# Altium PCB Super_Hornet.PcbDoc (part 4 of 4)
Units mil, origin at the board's own origin, x right, y up, seen from the top; angles counter-clockwise.
Board outline 6000 x 4000 mil, 2 copper layers (Top Layer, Bottom Layer); 166 components, 85 nets, 398 pads, 0 vias.
Unrouted connection lines stored in the file: 74.
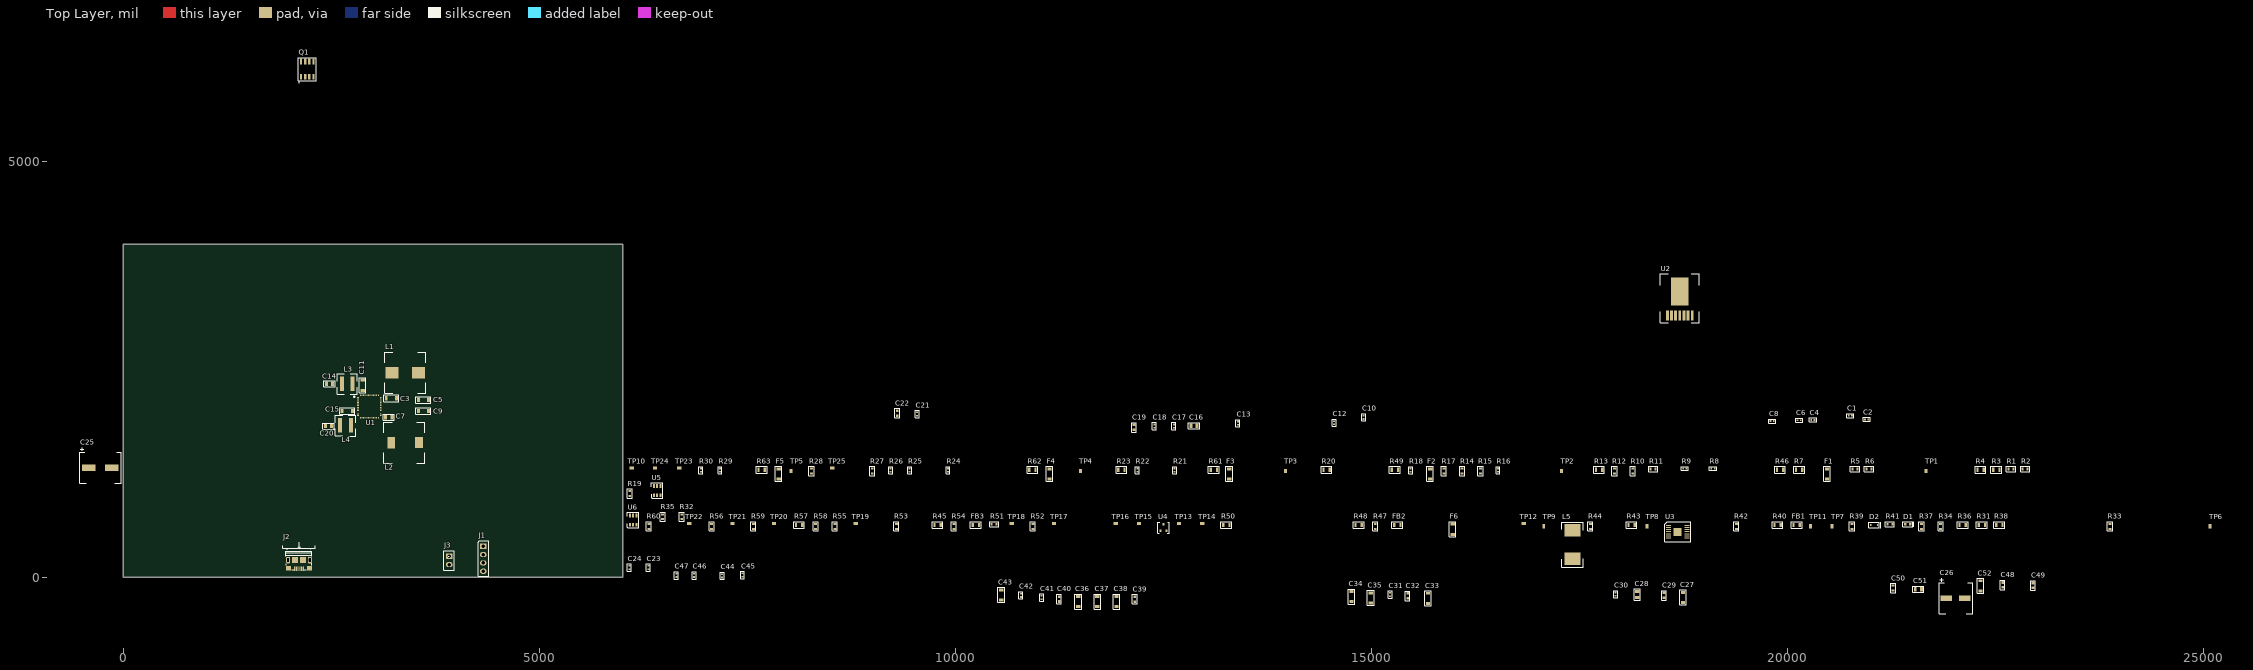
[diagram p0: Top Layer view]

## Part data (continued)
R42 R51: "RES SMD 49.9K OHM 1% 1/10W 0603", Manufacturer=Panasonic, Rated Power="0.1 W", Resistance=49.9K, Supplier Part Number 1=P49.9KHCT-ND, Temp Coefficient="±100 ppm/°C", Tolerance (%)="±1 %", ComponentLink1Description=http://industrial.panasonic.com/cdbs/www-data/pdf/RDA0000/AOA0000C304.pdf?src-supplier=Farnell, ComponentLink1URL=http://industrial.panasonic.com/cdbs/www-data/pdf/RDA0000/AOA0000C304.pdf?src-supplier=Farnell, ComponentLink2Description=http://www.farnell.com/datasheets/1911175.pdf?src-supplier=Element14, ComponentLink2URL=http://www.farnell.com/datasheets/1911175.pdf?src-supplier=Element14, ComponentLink3Description=http://industrial.panasonic.com/www-data/pdf/AOA0000/AOA0000CE2.pdf?src-supplier=Future+Electronics, ComponentLink3URL=http://industrial.panasonic.com/www-data/pdf/AOA0000/AOA0000CE2.pdf?src-supplier=Future+Electronics, ComponentLink4Description=http://industrial.panasonic.com/www-data/pdf/AOA0000/AOA0000CE2.pdf?src-supplier=Avnet+Europe, ComponentLink4URL=http://industrial.panasonic.com/www-data/pdf/AOA0000/AOA0000CE2.pdf?src-supplier=Avnet+Europe, ComponentLink5Description=http://www.farnell.com/datasheets/1911175.pdf?src-supplier=Farnell, ComponentLink5URL=http://www.farnell.com/datasheets/1911175.pdf?src-supplier=Farnell, ComponentLink6Description=http://industrial.panasonic.com/www-data/pdf/AOA0000/AOA0000CE2.pdf?src-supplier=Avnet, ComponentLink6URL=http://industrial.panasonic.com/www-data/pdf/AOA0000/AOA0000CE2.pdf?src-supplier=Avnet, ComponentLink7Description=http://www.farnell.com/datasheets/1678782.pdf?src-supplier=Element14, ComponentLink7URL=http://www.farnell.com/datasheets/1678782.pdf?src-supplier=Element14, ComponentLink8Description=https://www.verical.com/server-webapp/html/getDatasheet?partID=52039&src-supplier=Verical, ComponentLink8URL=https://www.verical.com/server-webapp/html/getDatasheet?partID=52039&src-supplier=Verical, ComponentLink9Description=http://www.jameco.com/Jameco/Products/ProdDS/1988209.pdf?src-supplier=Jameco, ComponentLink9URL=http://www.jameco.com/Jameco/Products/ProdDS/1988209.pdf?src-supplier=Jameco, Manufacturer Part Number=ERJ-3EKF4992V, Pricing 1="1=0.1, 10=0.035, 100=0.0143, 1000=0.0064, 2500=0.0056 (USD)", Size Code=0603, Stock 1=110527, Supplier 1=Digi-Key
R47: "RES SMD 100K OHM 1% 1/10W 0603", Manufacturer=Panasonic, Rated Power="0.1 W", Resistance=100K, Supplier Part Number 1=P100KHCT-ND, Temp Coefficient="±100 ppm/°C", Tolerance (%)="±1 %", ComponentLink1Description=http://industrial.panasonic.com/www-data/pdf/AOA0000/AOA0000CE2.pdf?src-supplier=Future+Electronics, ComponentLink1URL=http://industrial.panasonic.com/www-data/pdf/AOA0000/AOA0000CE2.pdf?src-supplier=Future+Electronics, ComponentLink2Description=https://www.verical.com/server-webapp/html/getDatasheet?partID=247527&src-supplier=Verical, ComponentLink2URL=https://www.verical.com/server-webapp/html/getDatasheet?partID=247527&src-supplier=Verical, ComponentLink3Description=http://www.alliedelec.com/m/d/623f45ff1957d936ff56d46fd1c28cac.pdf?src-supplier=Allied+Electronics, ComponentLink3URL=http://www.alliedelec.com/m/d/623f45ff1957d936ff56d46fd1c28cac.pdf?src-supplier=Allied+Electronics, ComponentLink4Description=http://www.jameco.com/Jameco/Products/ProdDS/1987476.pdf?src-supplier=Jameco, ComponentLink4URL=http://www.jameco.com/Jameco/Products/ProdDS/1987476.pdf?src-supplier=Jameco, Manufacturer Part Number=ERJ3EKF1003V, Pricing 1="1=0.1, 10=0.062, 100=0.0252, 1000=0.0113, 2500=0.0098 (USD)", Size Code=0603, Stock 1=221575, Supplier 1=Digi-Key
R52: "RES SMD 150K OHM 1% 1/10W 0603", Case Size=0603, Case Style=Molded, Manufacturer=Panasonic, Operating Temperature="-55 to 155 °C", Power Rating="1/10 W", Resistance Value=150K, Supplier Part Number 1=P150KHCT-ND, Temperature Coefficient="±100 ppm/°C", Tolerance="1 %", Category="Resistor Fixed Single-Surface Mount", ComponentLink1Description=http://industrial.panasonic.com/www-data/pdf/AOA0000/AOA0000CE2.pdf?src-supplier=Avnet+Europe, ComponentLink1URL=http://industrial.panasonic.com/www-data/pdf/AOA0000/AOA0000CE2.pdf?src-supplier=Avnet+Europe, ComponentLink2Description=http://industrial.panasonic.com/www-data/pdf/AOA0000/AOA0000CE2.pdf?src-supplier=Avnet, ComponentLink2URL=http://industrial.panasonic.com/www-data/pdf/AOA0000/AOA0000CE2.pdf?src-supplier=Avnet, ComponentLink3Description=http://www.alliedelec.com/m/d/623f45ff1957d936ff56d46fd1c28cac.pdf?src-supplier=Allied+Electronics, ComponentLink3URL=http://www.alliedelec.com/m/d/623f45ff1957d936ff56d46fd1c28cac.pdf?src-supplier=Allied+Electronics, ComponentLink4Description=http://industrial.panasonic.com/www-data/pdf/AOA0000/AOA0000CE2.pdf?src-supplier=Element14, ComponentLink4URL=http://industrial.panasonic.com/www-data/pdf/AOA0000/AOA0000CE2.pdf?src-supplier=Element14, ComponentLink5Description=http://www.farnell.com/datasheets/426256.pdf?src-supplier=Element14, ComponentLink5URL=http://www.farnell.com/datasheets/426256.pdf?src-supplier=Element14, ComponentLink6Description=http://www.farnell.com/datasheets/1678782.pdf?src-supplier=Element14, ComponentLink6URL=http://www.farnell.com/datasheets/1678782.pdf?src-supplier=Element14, ComponentLink7Description=http://www.farnell.com/datasheets/1911175.pdf?src-supplier=Farnell, ComponentLink7URL=http://www.farnell.com/datasheets/1911175.pdf?src-supplier=Farnell, Lead Finish=Tin, Manufacturer Part Number=ERJ-3EKF1503V, Pricing 1="1=0.1, 10=0.058, 100=0.0234, 1000=0.0105, 2500=0.0091 (USD)", Stock 1=81478, Supplier 1=Digi-Key, Type="Thick Film"
R55 R56: "RES SMD 6.34K OHM 1% 1/10W 0603", Manufacturer=Panasonic, Power Rating=100mW, Resistance=6.34K, Resistance Tolerance="± 1%", Resistor Case Style="0603 [1608 Metric]", Resistor Element Material="Thick Film", Resistor Mounting=SMD, Supplier Part Number 1=P6.34KHCT-ND, Temperature Coefficient="± 100ppm/°C", Voltage Rating=75V, ComponentLink1Description=http://www.farnell.com/datasheets/426256.pdf?src-supplier=Element14, ComponentLink1URL=http://www.farnell.com/datasheets/426256.pdf?src-supplier=Element14, ComponentLink2Description=http://www.mouser.com/ds/2/315/AOA0000C283-1093288.pdf?src-supplier=Mouser, ComponentLink2URL=http://www.mouser.com/ds/2/315/AOA0000C283-1093288.pdf?src-supplier=Mouser, ComponentLink3Description=https://www.alliedelec.com/m/d/623f45ff1957d936ff56d46fd1c28cac.pdf?src-supplier=Allied+Electronics, ComponentLink3URL=https://www.alliedelec.com/m/d/623f45ff1957d936ff56d46fd1c28cac.pdf?src-supplier=Allied+Electronics, ComponentLink4Description=http://www.farnell.com/datasheets/1911175.pdf?src-supplier=Farnell, ComponentLink4URL=http://www.farnell.com/datasheets/1911175.pdf?src-supplier=Farnell, ComponentLink5Description=http://www.farnell.com/datasheets/1678782.pdf?src-supplier=Element14, ComponentLink5URL=http://www.farnell.com/datasheets/1678782.pdf?src-supplier=Element14, ComponentLink6Description=http://industrial.panasonic.com/www-data/pdf/AOA0000/AOA0000CE2.pdf?src-supplier=Avnet, ComponentLink6URL=http://industrial.panasonic.com/www-data/pdf/AOA0000/AOA0000CE2.pdf?src-supplier=Avnet, Manufacturer Part Number=ERJ-3EKF6341V, MSL="(Not Applicable)", Packaging="Cut Tape", Pricing 1="1=0.1, 10=0.05, 100=0.0203, 1000=0.0091, 2500=0.0079 (USD)", Product Range="PANASONIC - ERJ Series", Resistor Element Type="Thick Film", Stock 1=215692, Supplier 1=Digi-Key, SVHC="Diboron trioxide (19-Dec-2012)", SVHC (Secondary)="Lead monoxide (lead oxide) (19-Dec-2012)"
R58: "RES SMD 9.31K OHM 1% 1/10W 0603", Manufacturer=Panasonic, Rated Power="0.1 W", Resistance=9.31K, Supplier Part Number 1=P9.31KHCT-ND, Temp Coefficient="±100 ppm/°C", Tolerance (%)="±1 %", ComponentLink1Description=http://industrial.panasonic.com/www-data/pdf/AOA0000/AOA0000CE2.pdf?src-supplier=Avnet, ComponentLink1URL=http://industrial.panasonic.com/www-data/pdf/AOA0000/AOA0000CE2.pdf?src-supplier=Avnet, ComponentLink2Description=http://www.farnell.com/datasheets/1678782.pdf?src-supplier=Element14, ComponentLink2URL=http://www.farnell.com/datasheets/1678782.pdf?src-supplier=Element14, ComponentLink3Description=http://industrial.panasonic.com/www-data/pdf/AOA0000/AOA0000CE2.pdf?src-supplier=Future+Electronics, ComponentLink3URL=http://industrial.panasonic.com/www-data/pdf/AOA0000/AOA0000CE2.pdf?src-supplier=Future+Electronics, ComponentLink4Description=http://industrial.panasonic.com/www-data/pdf/AOA0000/AOA0000CE2.pdf?src-supplier=Avnet+Asia, ComponentLink4URL=http://industrial.panasonic.com/www-data/pdf/AOA0000/AOA0000CE2.pdf?src-supplier=Avnet+Asia, ComponentLink5Description=http://www.farnell.com/datasheets/1911175.pdf?src-supplier=Farnell, ComponentLink5URL=http://www.farnell.com/datasheets/1911175.pdf?src-supplier=Farnell, ComponentLink6Description=https://www.alliedelec.com/m/d/623f45ff1957d936ff56d46fd1c28cac.pdf?src-supplier=Allied+Electronics, ComponentLink6URL=https://www.alliedelec.com/m/d/623f45ff1957d936ff56d46fd1c28cac.pdf?src-supplier=Allied+Electronics, ComponentLink7Description=http://industrial.panasonic.com/www-data/pdf/AOA0000/AOA0000CE2.pdf?src-supplier=Avnet+Europe, ComponentLink7URL=http://industrial.panasonic.com/www-data/pdf/AOA0000/AOA0000CE2.pdf?src-supplier=Avnet+Europe, ComponentLink8Description=http://www.mouser.com/ds/2/315/AOA0000CE2-37512.pdf?src-supplier=Mouser, ComponentLink8URL=http://www.mouser.com/ds/2/315/AOA0000CE2-37512.pdf?src-supplier=Mouser, ComponentLink9Description=http://www.farnell.com/datasheets/1911175.pdf?src-supplier=Element14, ComponentLink9URL=http://www.farnell.com/datasheets/1911175.pdf?src-supplier=Element14, Manufacturer Part Number=ERJ-3EKF9311V, Pricing 1="1=0.1, 10=0.062, 100=0.0253, 1000=0.0113, 2500=0.0098 (USD)", Size Code=0603, Stock 1=98740, Supplier 1=Digi-Key
TP1 TP2 TP3 TP4 TP5 TP6 TP7 TP8 TP9 TP10 TP11 TP12 TP13 TP14 TP15 TP16 TP17 TP18 TP19 TP20 TP21 TP22 TP23 TP24 TP25: "PCB MINI TEST POINT", Manufacturer="Keystone Electronics", Standard Package=5,000, Supplier Part Number 1=36-5017TR-NDL, Category="Test and Measurement", ComponentLink1Description=http://www.keyelco.com/product-pdf.cfm?p=1355&src-supplier=Digi-Key, ComponentLink1URL=http://www.keyelco.com/product-pdf.cfm?p=1355&src-supplier=Digi-Key, Dynamic Catalog="Surface Mount Test Points", Family="Test Points", Featured Product="5019 Miniature Surface Mount Test Point", Manufacturer Part Number=5017, Material="Phosphor Bronze", Minimum Quantity="PC Test Point, Miniature", Mounting Type="Surface Mount", Online Catalog="Surface Mount Test Points", Other Names="5017-ND / 5017KTR / Q5021014", Packaging="Tape & Reel (TR)", Pricing 1="5000=0.0924 (USD)", Quantity Available="Tape & Reel (TR)Alternate Packaging", RoHS Information="RoHS Compliance Statement", Stock 1=285000, Supplier 1=Digi-Key, Terminal="0.010\" (0.25mm) Phosphor Bronze, Silver Plated", Type="PC Test Point, Miniature"
U1: library part ADP5052ACPZ-R7, "PMIC 4BUCK_1LDO", Frequency - Switching=740kHz, Manufacturer="Analog Devices", Operating Temperature="-40°C ~ 125°C", Package / Case="48-WFQFN Exposed Pad, CSP", Power Rating=100mW, Resistance=3.65kohm, Resistance Tolerance="± 1%", Resistor Case Style="0402 [1005 Metric]", Resistor Element Material="Thick Film", Resistor Mounting=SMD, Resistor Terminals=Wraparound, Standard Package=1, Supplier Device Package="48-LFCSP-WQ (7x7)", Supplier Part Number 1=ADP5052ACPZ-R7CT-ND, Temperature Coefficient="± 100ppm/°C", Voltage - Supply="4.5 V ~ 15 V", Voltage/Current - Output 1="0.85 V ~ 1.6 V, PROG", Voltage/Current - Output 2="3.3 V ~ 5 V, PROG", Voltage/Current - Output 3="1.2 V ~ 1.8 V, 1.2A", Voltage Rating=50V, Category="Integrated Circuits (ICs)", ComponentLink1Description=http://www.mouser.com/ds/2/609/ADP5052-878958.pdf?src-supplier=Mouser, ComponentLink1URL=http://www.mouser.com/ds/2/609/ADP5052-878958.pdf?src-supplier=Mouser, ComponentLink2Description=http://uk.rs-online.com/webdocs/1492/0900766b81492551.pdf?src-supplier=RSComponents, ComponentLink2URL=http://uk.rs-online.com/webdocs/1492/0900766b81492551.pdf?src-supplier=RSComponents, ComponentLink3Description=http://www.analog.com/media/en/technical-documentation/data-sheets/ADP5052.PDF?src-supplier=Digi-Key, ComponentLink3URL=http://www.analog.com/media/en/technical-documentation/data-sheets/ADP5052.PDF?src-supplier=Digi-Key, ComponentLink4Description=http://www.analog.com/static/imported-files/data_sheets/ADP5052.PDF?src-supplier=Avnet, ComponentLink4URL=http://www.analog.com/static/imported-files/data_sheets/ADP5052.PDF?src-supplier=Avnet, ComponentLink5Description=https://www.analog.com/media/en/technical-documentation/data-sheets/ADP5052.PDF?src-supplier=Digi-Key, ComponentLink5URL=https://www.analog.com/media/en/technical-documentation/data-sheets/ADP5052.PDF?src-supplier=Digi-Key, ComponentLink6Description=http://www.produktinfo.conrad.com/datenblaetter/1200000-1299999/001251707-da-01-en-IC_REG_5OUT_ADP5052ACPZ_R7_LFCSP_48_ADI.pdf?src-supplier=Conrad, ComponentLink6URL=http://www.produktinfo.conrad.com/datenblaetter/1200000-1299999/001251707-da-01-en-IC_REG_5OUT_ADP5052ACPZ_R7_LFCSP_48_ADI.pdf?src-supplier=Conrad, ComponentLink7Description=http://industrial.panasonic.com/www-data/pdf/AOA0000/AOA0000CE2.pdf?src-supplier=Avnet, ComponentLink7URL=http://industrial.panasonic.com/www-data/pdf/AOA0000/AOA0000CE2.pdf?src-supplier=Avnet, ComponentLink8Description=http://www.mouser.com/ds/2/315/AOA0000C283-1093288.pdf?src-supplier=Mouser, ComponentLink8URL=http://www.mouser.com/ds/2/315/AOA0000C283-1093288.pdf?src-supplier=Mouser, ComponentLink9Description=http://www.farnell.com/datasheets/1694929.pdf?src-supplier=Element14, ComponentLink9URL=http://www.farnell.com/datasheets/1694929.pdf?src-supplier=Element14, ComponentLink10Description=https://www.alliedelec.com/m/d/623f45ff1957d936ff56d46fd1c28cac.pdf?src-supplier=Allied+Electronics, ComponentLink10URL=https://www.alliedelec.com/m/d/623f45ff1957d936ff56d46fd1c28cac.pdf?src-supplier=Allied+Electronics, ComponentLink11Description=http://www.farnell.com/datasheets/1678782.pdf?src-supplier=Element14, ComponentLink11URL=http://www.farnell.com/datasheets/1678782.pdf?src-supplier=Element14, Dynamic Catalog="Linear + Switching", Family="PMIC - Voltage Regulators - Linear + Switching", Featured Product="2nd Quarter Select Products", For Use With="ADP5052-EVALZ-ND / - EVAL BOARD BUCK REG/LDO ADP5052", Function="Any Function", Manufacturer Part Number=ADP5052ACPZ-R7, Minimum Quantity="Step-Down (Buck) Synchronous (5), Linear (LDO) (1)", Mounting Type="Surface Mount", MSL="(Not Applicable)", Number of Outputs=5, Online Catalog="Linear + Switching", Other Names=ADP5052ACPZ-R7CT, Package/Case="48-WFQFN Exposed Pad, CSP", Packaging="Cut Tape (CT)", PCN Assembly/Origin="Assembly and Test Transfer LFCSP Devices 22/Oct/2013 /  / Assembly/Test Site Revision D 06/Aug/2014", PCN Design/Specification="ADP5050/ADP5052 Die Revision 06/Jan/2014", Pricing 1="1=8.54, 10=7.719, 25=7.3596, 100=6.103, 250=5.5645 (USD)", Pricing 2="1=0.1, 10=0.041, 100=0.0166, 1000=0.0075, 2500=0.0065, 5000=0.0054 (USD)", Product Range="PANASONIC - ERJ Series", Quantity Available="Cut Tape (CT)Alternate Packaging", Resistor Element Type="Thick Film", Stock 1=0, Stock 2=78045, Supplier 1=Digi-Key, Supplier 2=Digi-Key, Supplier Part Number 2=P3.65KLCT-ND, SVHC="Diboron trioxide (19-Dec-2012)", SVHC (Secondary)="Lead monoxide (lead oxide) (19-Dec-2012)", Topology="Step-Down (Buck) Synchronous (4), Linear (LDO) (1)", w/LED Driver=No, w/Sequencer=No, w/Supervisor=No
U2: "DC DC CONVERTER 0.8-6V", Manufacturer="TI National Semiconductor", Operating Temperature (Max)=125C, Operating Temperature (Min)=-40C, Output Current=5A, Output Power=30W, Supplier Part Number 1=296-43603-1-ND, ComponentLink1Description=http://www.ti.com/lit/ds/symlink/lmz22005.pdf?src-supplier=Digi-Key, ComponentLink1URL=http://www.ti.com/lit/ds/symlink/lmz22005.pdf?src-supplier=Digi-Key, Manufacturer Part Number=LMZ22005TZX/NOPB, Mounting Style="Surface Mount", Number of Outputs=1, Package / Case=-40C, Packaging="Tape and Reel", Pin Count="Tape and Reel", Pricing 1="1=9.19, 5=9.124, 10=9.055, 25=8.9156, 50=8.637, 100=7.8012, 250=7.6619 (USD)", Product Depth (mm)="Surface Mount", Product Height (mm)=4.57mm, Product Length (mm)=10.16mm, Screening Level=Automotive, Stock 1=1814, Supplier 1=Digi-Key, Type="Step Down"
U3: "IC REG BUCK ADJ 3A SYNC 14HTSSOP", Current - Output=3A, Frequency - Switching=700kHz, Manufacturer="Texas Instruments", Operating Temperature="-40°C ~ 85°C", Package / Case="14-TSSOP (0.173\", 4.40mm Width) Exposed Pad", Standard Package=1, Supplier Device Package=14-HTSSOP, Supplier Part Number 1=296-24557-1-ND, Voltage - Input="2 V ~ 18 V", Voltage - Output="0.76 V ~ 5.5 V", Category="Integrated Circuits (ICs)", ComponentLink1Description=http://www.ti.com/lit/ds/symlink/tps54325.pdf?src-supplier=Digi-Key, ComponentLink1URL=http://www.ti.com/lit/ds/symlink/tps54325.pdf?src-supplier=Digi-Key, ComponentLink2Description=http://www.ti.com/lit/gpn/tps54325?src-supplier=Mouser, ComponentLink2URL=http://www.ti.com/lit/gpn/tps54325?src-supplier=Mouser, ComponentLink3Description=http://www.ti.com/general/docs/lit/getliterature.tsp?genericPartNumber=TPS54325&&fileType=pdf&src-supplier=Avnet, ComponentLink3URL=http://www.ti.com/general/docs/lit/getliterature.tsp?genericPartNumber=TPS54325&&fileType=pdf&src-supplier=Avnet, ComponentLink4Description=http://datasheet.iiic.cc/texas_instruments/TPS54325PWPR.pdf?src-supplier=IIIC, ComponentLink4URL=http://datasheet.iiic.cc/texas_instruments/TPS54325PWPR.pdf?src-supplier=IIIC, ComponentLink5Description=http://www.produktinfo.conrad.com/datenblaetter/1000000-1099999/001014848-da-01-en-IC_REG_BUCK_SY_TPS54325PWPR_TSSOP_14_TID.pdf?src-supplier=Conrad, ComponentLink5URL=http://www.produktinfo.conrad.com/datenblaetter/1000000-1099999/001014848-da-01-en-IC_REG_BUCK_SY_TPS54325PWPR_TSSOP_14_TID.pdf?src-supplier=Conrad, Dynamic Catalog="Buck (Step-Down) IC", Family="PMIC - Voltage Regulators - DC DC Switching Regulators", Featured Product="TPS54325 - 3A Step-Down SWIFT™ Converter /  / WEBENCH Design Center", Manufacturer Part Number=TPS54325PWPR, Mounting Type="Surface Mount", Number of Outputs=1, Other Names=296-24557-1, Output Type=Adjustable, Packaging="Cut Tape (CT)", Pricing 1="1=1.63, 10=1.468, 25=1.3852, 100=1.108, 250=0.9695, 500=0.9418, 1000=0.7479 (USD)", Product Training Modules="Understanding SWIFT Step Down Dc/Dc Converters", PWM Type=Hybrid, Series="SWIFT™, D-CAP2™", Stock 1=45243, Supplier 1=Digi-Key, Synchronous Rectifier=Yes, Type="Step-Down (Buck)"
U4: "IC VREF SERIES 0.2% SOT23-3", Manufacturer="Texas Instruments", Maximum Input Voltage="7 V", Maximum Output Current="25 mA", Maximum Temperature Coefficient="75 ppm/°C", Operating Temperature="-40 to 125 °C", Output Voltage="1.25 V", Package=3SOT-23, Supplier Part Number 1=296-32213-1-ND, Category="Voltage Reference", ComponentLink1Description=http://www.ti.com/lit/ds/symlink/ref3012.pdf?src-supplier=Digi-Key, ComponentLink1URL=http://www.ti.com/lit/ds/symlink/ref3012.pdf?src-supplier=Digi-Key, ComponentLink2Description=http://www.ti.com/general/docs/lit/getliterature.tsp?genericPartNumber=REF3030&&fileType=pdf&src-supplier=Avnet, ComponentLink2URL=http://www.ti.com/general/docs/lit/getliterature.tsp?genericPartNumber=REF3030&&fileType=pdf&src-supplier=Avnet, Initial Accuracy="0.2 %", Line Regulation="190 uV/V", Load Regulation="100 uV/mA", Manufacturer Part Number=REF3012AIDBZR, Mounting="Surface Mount", Packaging="Tape & Reel", Pricing 1="1=1.39, 10=1.245, 25=1.1816, 100=0.9073, 250=0.8018, 500=0.7596, 1000=0.5908 (USD)", Rad Hard=No, Reference Type=Precision, Stock 1=28859, Supplier 1=Digi-Key, Topology=Series
U5 U6: "IC OPAMP CURR SENSE 14KHZ SC70-6", Current - Input Bias=28µA, Current - Output / Channel=-, Current - Supply=65µA, Manufacturer="Texas Instruments", Operating Temperature="-40°C ~ 105°C", Package / Case="6-TSSOP, SC-88, SOT-363", Standard Package=1, Supplier Device Package=SC-70-6, Supplier Part Number 1=296-27329-1-ND, Voltage - Input Offset=5µV, Voltage - Supply, Single/Dual (±)="2.7 V ~ 26 V", -3db Bandwidth=-, Amplifier Type="Current Sense", Category="Integrated Circuits (ICs)", ComponentLink1Description=http://components.arrow.com/part/dataview/48823731S9057778N7713?src-supplier=Arrow, ComponentLink1URL=http://components.arrow.com/part/dataview/48823731S9057778N7713?src-supplier=Arrow, ComponentLink2Description=https://www.verical.com/server-webapp/html/getDatasheet?partID=518602&src-supplier=Verical, ComponentLink2URL=https://www.verical.com/server-webapp/html/getDatasheet?partID=518602&src-supplier=Verical, ComponentLink3Description=http://components.arrow.com/part/dataview/0323_01815168?src-supplier=Arrow+Europe, ComponentLink3URL=http://components.arrow.com/part/dataview/0323_01815168?src-supplier=Arrow+Europe, ComponentLink4Description=http://www.farnell.com/datasheets/2019159.pdf?src-supplier=Element14, ComponentLink4URL=http://www.farnell.com/datasheets/2019159.pdf?src-supplier=Element14, ComponentLink5Description=http://www.ti.com/general/docs/lit/getliterature.tsp?genericPartNumber=INA199&fileType=pdf&src-supplier=Farnell, ComponentLink5URL=http://www.ti.com/general/docs/lit/getliterature.tsp?genericPartNumber=INA199&fileType=pdf&src-supplier=Farnell, ComponentLink6Description=http://focus.ti.com/lit/ds/symlink/ina199a2.pdf?src-supplier=Avnet+Europe, ComponentLink6URL=http://focus.ti.com/lit/ds/symlink/ina199a2.pdf?src-supplier=Avnet+Europe, ComponentLink7Description=http://www.farnell.com/datasheets/1846955.pdf?src-supplier=Farnell, ComponentLink7URL=http://www.farnell.com/datasheets/1846955.pdf?src-supplier=Farnell, ComponentLink8Description=http://www.ti.com/lit/ds/symlink/ina199.pdf?src-supplier=Digi-Key, ComponentLink8URL=http://www.ti.com/lit/ds/symlink/ina199.pdf?src-supplier=Digi-Key, ComponentLink9Description=http://www.ti.com/lit/gpn/ina199?src-supplier=Mouser, ComponentLink9URL=http://www.ti.com/lit/gpn/ina199?src-supplier=Mouser, ComponentLink10Description=http://www.ti.com/general/docs/lit/getliterature.tsp?genericPartNumber=INA199&&fileType=pdf&src-supplier=Avnet, ComponentLink10URL=http://www.ti.com/general/docs/lit/getliterature.tsp?genericPartNumber=INA199&&fileType=pdf&src-supplier=Avnet, Dynamic Catalog="Current Sense", Family="Linear - Amplifiers - Instrumentation, OP Amps, Buffer Amps", Gain Bandwidth Product=14kHz, Manufacturer Part Number=INA199A1DCKR, Mounting Type="Surface Mount", Number of Circuits=1, Other Names=296-27329-6, Output Type=-, Packaging=Digi-Reel®, Pricing 1="1=0.83, 10=0.738, 25=0.7, 100=0.5375, 250=0.475, 500=0.45, 1000=0.35 (USD)", Series=-, Slew Rate="0.4 V/µs", Stock 1=158615, Supplier 1=Digi-Key

## Nets (pads, with @x,y where several pads share a name; then routed paths per layer and width w, separated by ;. In a path a pad name is that pad's centre, name@x,y a point inside that pad or via, vN(x,y) a via of type N, cw(c..) or ccw(c..) an arc to the next point about the centre after c; other vN are vias at no path point)
1V0: F2.2 R12.2 R49.1 TP2.1
1V8: F3.2 R11.2 R61.1 TP3.1
1V35: F4.2 R1.2 R62.1 TP4.1
3V3_FIL: C37.2 C38.2 C39.2 C42.2 FB2.2 R50.1 R55.2 R56.2 TP9.1 TP13.1 U4.1 U5.3 U6.3
5V5: C19.2 U1.8
+1V8: R40.2 R43.2 TP11.1
+3V3: F1.2 R46.1 R48.2 R50.2 TP12.1
+5V0_EXT: C26.1 C50.2 C52.2 J1.3 R33.2 R38.2 TP6.1 U2.7
+7V_20VDC: C25.1 C48.2 C49.2 J3.2 R52.2 U2.1
+VCC_5V: C31.1 C32.2 C33.2 R37.2 R44.1 U3.13 U3.14 U5.5
EN1: R1.1 R5.2 U1.5 U1.37
EN3: R12.1 R17.2 U1.48
EN4: R11.1 R15.2 U1.14
GND: C3.1 C5.1 C7.1 C9.1 C11.1 C14.1 C15.1 C19.1 C20.1 C22.1 C23.1 C24.1 C25.2 C26.2 C28.1 C29.1 C31.2 C32.1 C33.1 C34.1 C35.1 C36.1 C37.1 C38.1 C39.1 C40.1 C41.2 C44.2 C45.2 C46.1 C47.1 C48.1 C49.1 C50.1 C51.1 C52.1 D1.2 D2.1 FB3.1 J2.4 J2.5 J2.6 J2.7 J2.8 J2.9 J2.10 J2.11 Q1.1 Q1.3 R3.2 R5.1 R6.1 R7.1 R8.1 R9.2 R13.1 R14.1 R15.1 R16.1 R17.1 R20.1 R22.1 R23.1 R24.1 R26.1 R28.2 R30.1 R35.1 R36.1 R39.2 R41.1 R45.2 R46.2 R49.2 R53.1 R54.1 R57.2 R58.2 R59.1 R60.1 R61.2 R62.2 R63.2 U1.2 U1.11 U1.13 U1.17 U1.18 U1.19 U1.30 U2.4 U2.8 U3.5 U3.8 U3.9 U3.15 U4.3 U5.2 U6.2
NetC1_1: C1.1 C5.2 F1.1 L1.2 R4.2 TP1.1
NetC1_2: C1.2 R3.1 R4.1 U1.40
NetC2_1: C2.1 L1.1 Q1.7 Q1.8 U1.33 U1.34
NetC2_2: C2.2 U1.32
NetC4_1: C4.1 U1.39
NetC4_2: C4.2 R7.2
NetC6_1: C6.1 U1.28
NetC6_2: C6.2 L2.1 Q1.5 Q1.6 U1.26 U1.27
NetC8_1: C8.1 U1.22
NetC8_2: C8.2 R13.2
NetC9_2: C9.2 C10.1 L2.2 R18.1 R19.1 U6.4
NetC10_2: C10.2 R16.2 R18.2 U1.21
NetC12_1: C12.1 U1.46
NetC12_2: C12.2 R20.2
NetC13_1: C13.1 U1.1
NetC13_2: C13.2 L3.1 U1.3
NetC14_2: C14.2 C17.1 F3.1 L3.2 R21.2
NetC16_1: C16.1 U1.15
NetC16_2: C16.2 R23.2
NetC17_2: C17.2 R21.1 R22.2 U1.45
NetC18_1: C18.1 U1.12
NetC18_2: C18.2 L4.1 U1.10
NetC20_2: C20.2 C21.1 F4.1 L4.2 R25.2
NetC21_2: C21.2 R25.1 R26.2 U1.16
NetC22_2: C22.2 F5.1 R29.2 TP5.1 U1.7
NetC23_2: C23.2 TP23.1 U1.42
NetC24_2: C24.2 TP24.1 U1.44
NetC27_1: C27.1 R42.1 U3.1
NetC28_2: C28.2 FB1.1 R40.1
NetC29_2: C29.2 FB1.2 R43.1 TP7.1
NetC30_1: C30.1 U3.12
NetC30_2: C30.2 L5.1 U3.10 U3.11
NetC34_2: C34.2 C35.2 F6.1 L5.2
NetC36_2: C36.2 FB2.1 R48.1
NetC40_2: C40.2 R47.1 U3.6
NetC41_1: C41.1 U3.4
NetC42_1: C42.1 C43.1 FB3.2 R45.1
NetC44_1: C44.1 R51.1 R53.2 TP18.1
NetC45_1: C45.1 R52.1 R54.2 TP17.1
NetC46_2: C46.2 R55.1 R59.2 TP19.1 U5.1
NetC47_2: C47.2 R56.1 R60.2 TP20.1 U6.1
NetD1_1: D1.1 R33.1
NetD2_2: D2.2 R32.1 R34.1 R35.2
NetF2_1: F2.1 R19.2 U6.5
NetF5_2: F5.2 R63.1 TP25.1
NetF6_2: F6.2 TP8.1
NetJ1_1: J1.1 J2.1
NetJ3_1: J3.1 R32.2
NetQ1_2: Q1.2 R8.2 U1.31
NetR9_1: R9.1 U1.29
NetR24_2: R24.2 U1.41
NetR27_1: R27.1 R28.1 U1.43
NetR29_1: R29.1 R30.2 U1.6
NetR31_1: R31.1 R38.1
NetR31_2: R31.2 R36.2 U2.5
NetR34_2: R34.2 U2.3
NetR41_2: R41.2 U2.2
NetR44_2: R44.2 U3.7
NetR47_2: R47.2 U3.3
NetR57_1: R57.1 TP21.1
NetR58_1: R58.1 TP22.1
NetTP10_1: TP10.1 U1.20
NetTP15_1: TP15.1 U5.6
NetTP16_1: TP16.1 U6.6
SNS5V0+: J1.2 J1.4 R37.1 R51.2 U5.4
SS12: R2.1 R6.2 U1.38
SS34: R10.1 R14.2 U1.47
VCC_5V: C3.2 C7.2 C11.2 C15.2 R27.2 U1.4 U1.9 U1.23 U1.24 U1.25 U1.35 U1.36
VFB: C27.2 R39.1 R42.2 U3.2
VREG: R2.2 R10.2
XADC_VREF: C43.2 TP14.1 U4.2
pads on no net: C51.2 J2.2 J2.3 Q1.4 U2.6